# Altium PCB PCB1.PcbDoc (part 1 of 4)
Units mil, origin at the board's own origin, x right, y up, seen from the top; angles counter-clockwise.
Board outline 1280 x 1960 mil, 2 copper layers (Top Layer, Bottom Layer); 39 components, 61 nets, 283 pads, 76 vias.
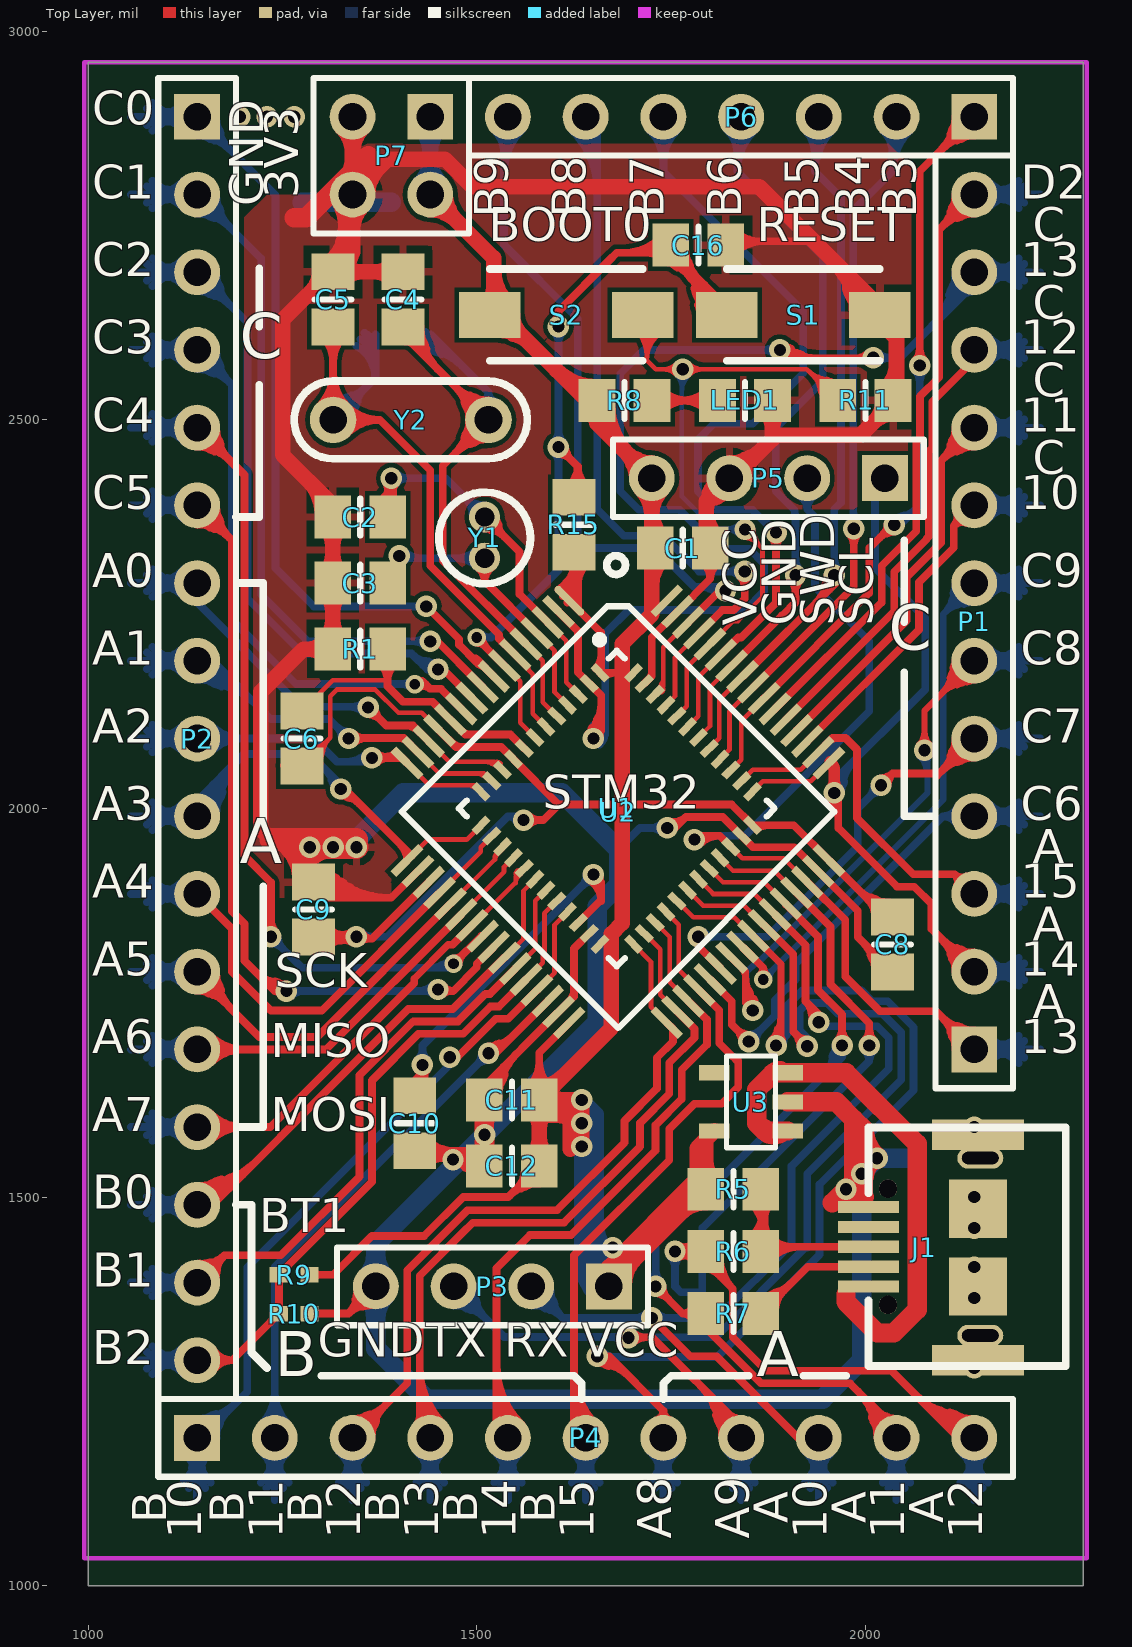
[diagram p0: Top Layer view]
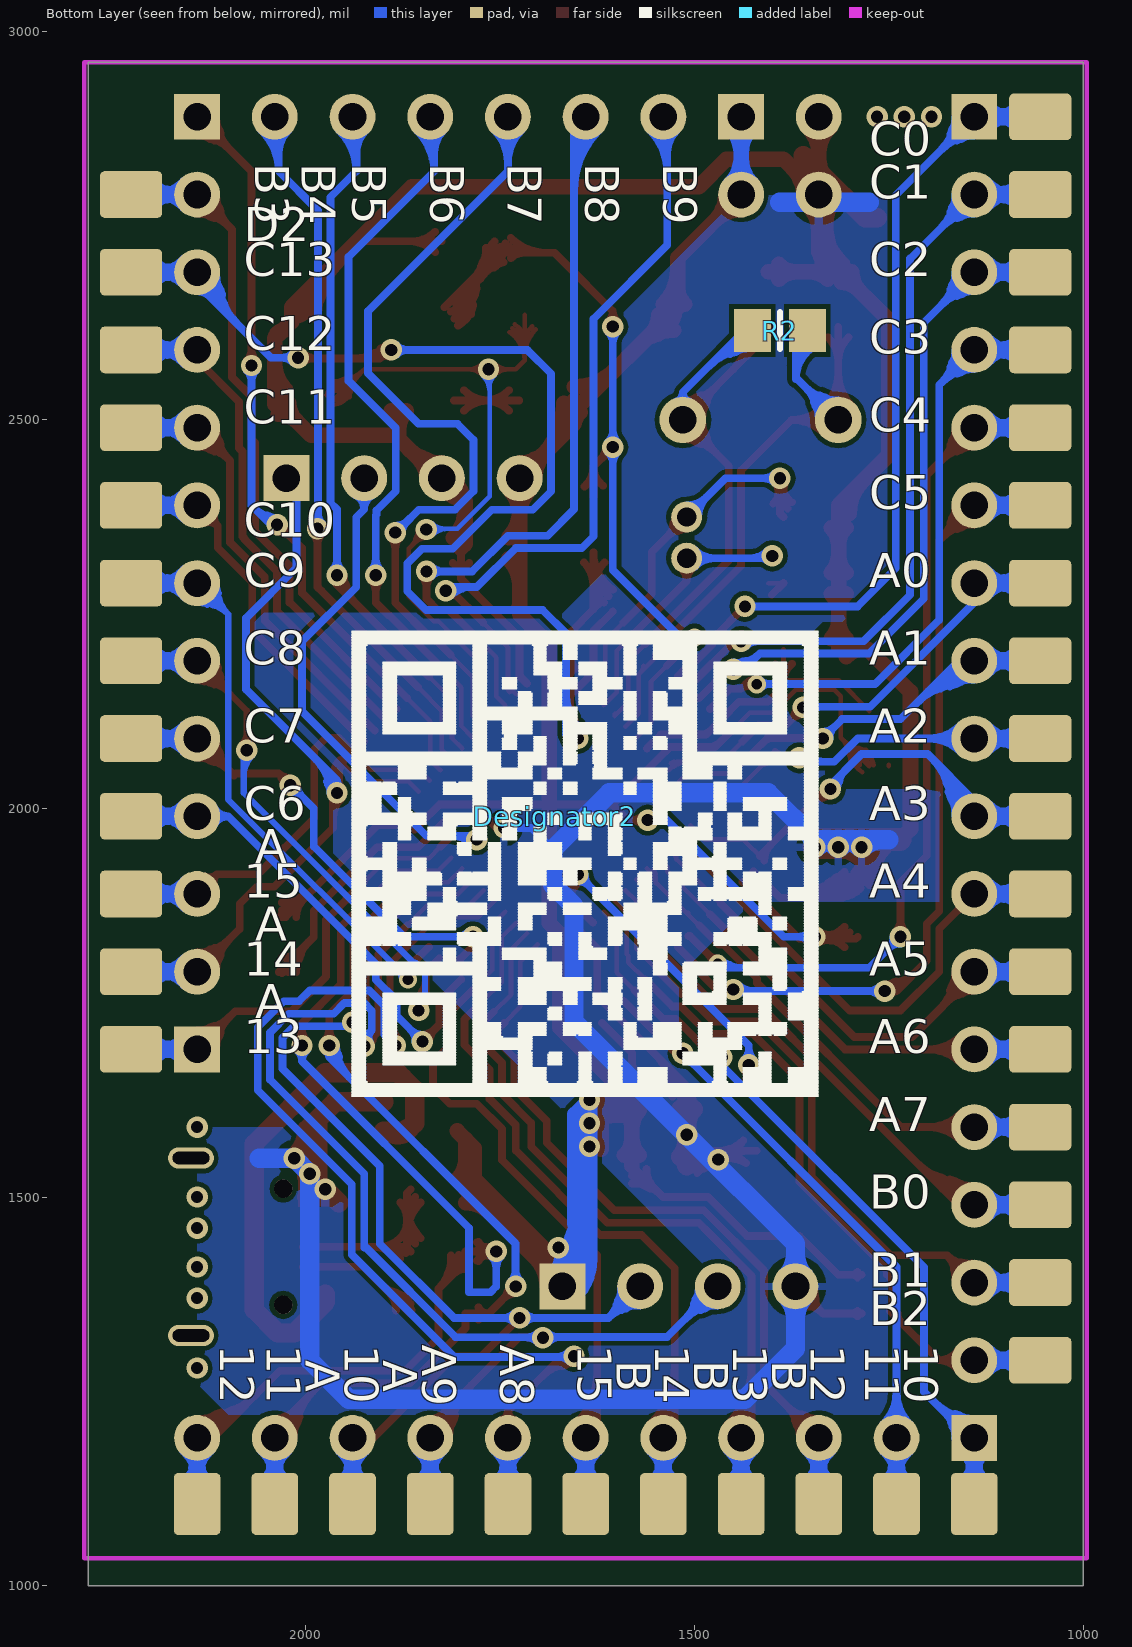
[diagram p1: Bottom Layer view, seen from below]

## Layer stack, top to bottom
Top Solder: solder mask 0.4, Solder Resist, Dk 3.5
Top Layer: signal copper 1.4
Dielectric 1: dielectric 12.6, FR-4, Dk 4.8
Bottom Layer: signal copper 1.4
Bottom Solder: solder mask 0.4, Solder Resist, Dk 3.5

## Board outline
1000,1000 2280,1000 2280,2960 1000,2960

## Design rules (kind name [scope] priority, off if disabled: settings)
Clearance [All] p1: gap=6
PolygonConnect [All] p1: connectstyle=Relief reliefconductorwidth=10 reliefentries=4 polygonreliefangle="90 Angle" airgapwidth=10
RoutingVias [All] p1: holewidth=15.75 width=27.56 viastyle="Through Hole" minholewidth=11.81 minwidth=23.62 maxholewidth=28 maxwidth=50
SolderMaskExpansion [All] p1: expansion=4
Width [All] p1: maxlimit=30 minlimit=6 preferedwidth=8
29 further rules are at their usual default settings.

## Components (designator, comment, footprint, x,y, rotation, side; value= is the part's Value field where it differs from the comment)
C1 "Cap" 6-0805_N 1765,2335 r0 top
C2 "Cap" 6-0805_N 1350,2375 r0 top
C3 "Cap" 6-0805_N 1350,2290 r0 top
C4 "Cap" 6-0805_N 1405,2655 r270 top
C5 "Cap" 6-0805_N 1315,2655 r270 top
C6 "Cap" 6-0805_N 1275,2090 r90 top
C8 "Cap" 6-0805_N 2035,1825 r270 top
C9 "Cap" 6-0805_N 1290,1870 r90 top
C10 "Cap" 6-0805_N 1420,1595 r90 top
C11 "Cap" 6-0805_N 1545,1625 r180 top
C12 "Cap" 6-0805_N 1545,1540 r180 top
C16 "Cap" 6-0805_N 1785,2725 r0 top
Designator2 "Comment" 二维码 1680,1990 r180 bottom
J1 "USB_M" usb-micro插 2120,1435 r270 top
LED1 "LED" 6-0805_N 1845,2525 r0 top
P1 "Header 12" HDR1X12 2140,1690 r90 top
P2 "Header 17" HDR1X17 1140,2890 r270 top
P3 "Header 4" HDR1X4 1670,1385 r180 top
P4 "Header 11" HDR1X11 1140,1190 r0 top
P5 "Header 4" HDR1X4 2025,2425 r180 top
P6 "Header 7" HDR1X7 2140,2890 r180 top
P7 "Header 2X2" HDR2X2 1440,2890 r180 top
R1 "0" 6-0805_N 1350,2205 r180 top
R2 "Res2" 6-0805_N 1390,2615 r180 bottom
R5 "Res2" 6-0805_N 1830,1510 r180 top
R6 "Res2" 6-0805_N 1830,1430 r0 top
R7 "Res2" 6-0805_N 1830,1350 r0 top
R8 "Res2" 6-0805_N 1690,2525 r0 top
R9 "Res2" 0402 1265,1400 r180 top
R10 "Res2" 0402 1265,1350 r180 top
R11 "Res2" 6-0805_N 2000,2525 r0 top
R15 "Res2" 6-0805_N 1625,2365 r90 top
S1 "SW-PB" key 1920,2635 r180 top
S2 "SW-PB" key 1615,2635 r180 top
U1 "stm32f401ccu6" qfn48精简 1680,2000 r315 top
U2 "STM32F103RCT6" lqfd64正常 1665,1995 r315 top
U3 "ldo3.3v" sot23_5 1850,1625 r270 top
Y1 "33.768K" XTAL_32.768 1510,2375 r270 top
Y2 "8M" 晶振2 1415,2500 r0 top

## Footprints (in the part's own frame and the unit in brackets; to place one, negate y for a bottom-side part, rotate by r counter-clockwise, add the part's x,y. Pads: shape width x height; smd on the part's side, far side on the other; paste and mask are expansions set on the pad)
6-0805_N [mm] "Chip Resistor, Body 2.0x1.2mm, IPC Medium Density"
  rect 1.2x1.4 smd: 1(-0.9,0) 2(0.9,0)
  silkscreen extent 0,-0.6 0,0.6, body extent -1.07,-0.7 1.07,0.7, height 0.7
0402 [mm] "Chip Capacitor, Body 1.0x0.5mm, IPC High Density"
  rect 0.6x0.5 smd: 1(-0.5,0) 2(0.5,0)
  body extent -0.55,-0.3 0.55,0.3, height 1.3
HDR1X4 [mm] "Connector; Header; 4 Position"
  rect 1.5x1.5 hole 0.9: 1(0,0)
  round 1.5 hole 0.9: 2(2.54,0) 3(5.08,0) 4(7.62,0)
  silkscreen extent -1.27,-1.27 8.89,1.27
HDR1X7 [mm] "Connector; Header; 7 Position"
  rect 1.5x1.5 hole 0.9: 1(0,0)
  round 1.5 hole 0.9: 2(2.54,0) 3(5.08,0) 4(7.62,0) 5(10.16,0) 6(12.7,0) 7(15.24,0)
  silkscreen extent -1.27,-1.27 16.51,1.27
HDR1X11 [mm] "Connector; Header; 11 Position"
  rect 1.5x1.5 hole 0.9: 1(0,0)
  round 1.5 hole 0.9: 2(2.54,0) 3(5.08,0) 4(7.62,0) 5(10.16,0) 6(12.7,0) 7(15.24,0) 8(17.78,0) 9(20.32,0) 10(22.86,0) 11(25.4,0)
  silkscreen extent -1.27,-1.27 26.67,1.27
HDR1X12 [mm] "Connector; Header; 12 Position"
  rect 1.5x1.5 hole 0.9: 1(0,0)
  round 1.5 hole 0.9: 2(2.54,0) 3(5.08,0) 4(7.62,0) 5(10.16,0) 6(12.7,0) 7(15.24,0) 8(17.78,0) 9(20.32,0) 10(22.86,0) 11(25.4,0) 12(27.94,0)
  silkscreen extent -1.27,-1.27 29.21,1.27
HDR1X17 [mm] "Connector; Header; 17 Position"
  rect 1.5x1.5 hole 0.9: 1(0,0)
  round 1.5 hole 0.9: 2(2.54,0) 3(5.08,0) 4(7.62,0) 5(10.16,0) 6(12.7,0) 7(15.24,0) 8(17.78,0) 9(20.32,0) 10(22.86,0) 11(25.4,0) 12(27.94,0) 13(30.48,0) 14(33.02,0) 15(35.56,0) 16(38.1,0) 17(40.64,0)
  silkscreen extent -1.27,-1.27 41.91,1.27
HDR2X2 [mm] "Connector; Header; 2x2 Position"
  rect 1.5x1.5 hole 0.9: 1(0,0)
  round 1.5 hole 0.9: 2(0,2.54) 3(2.54,0) 4(2.54,2.54)
  silkscreen extent -1.27,-1.27 3.81,3.81
key [mm]
  rect 2x1.5 smd: 1(-2.5,0) 2(2.5,0)
  silkscreen extent -2.5,-1.5 2.5,1.5
lqfd64正常 [mil]
  oval 50x10 smd: 1(-225,160)
  rect 50x10 smd: 2(-225,140.31) 3(-225,120.63) 4(-225,100.94) 5(-225,81.26) 6(-225,61.57) 7(-225,41.89) 8(-225,22.2) 9(-225,2.52) 10(-225,-17.17) 11(-225,-36.85) 12(-225,-56.54) 13(-225,-76.22) 14(-225,-95.91) 15(-225,-115.59) 16(-225,-135.28) 33(247.44,-135.28) 34(247.44,-115.59) 35(247.44,-95.91) 36(247.44,-76.22) 37(247.44,-56.54) 38(247.44,-36.85) 39(247.44,-17.17) 40(247.44,2.52) 41(247.44,22.2) 42(247.44,41.89) 43(247.44,61.57) 44(247.44,81.26) 45(247.44,100.94) 46(247.44,120.63) 47(247.44,140.31) 48(247.44,160)
  rect 10x50 smd: 17(-136.42,-223.86) 18(-116.73,-223.86) 19(-97.05,-223.86) 20(-77.36,-223.86) 21(-57.68,-223.86) 22(-37.99,-223.86) 23(-18.31,-223.86) 24(1.38,-223.86) 25(21.06,-223.86) 26(40.75,-223.86) 27(60.43,-223.86) 28(80.12,-223.86) 29(99.8,-223.86) 30(119.49,-223.86) 31(139.17,-223.86) 32(158.86,-223.86) 49(158.86,248.58) 50(139.17,248.58) 51(119.49,248.58) 52(99.8,248.58) 53(80.12,248.58) 54(60.43,248.58) 55(40.75,248.58) 56(21.06,248.58) 57(1.38,248.58) 58(-18.31,248.58) 59(-37.99,248.58) 60(-57.68,248.58) 61(-77.36,248.58) 62(-97.05,248.58) 63(-116.73,248.58) 64(-136.42,248.58)
  silkscreen extent -227,-184 208,247
qfn48精简 [mm]
  rect 0.65x0.25 smd: 1(-3.525,2.75) 2(-3.525,2.25) 3(-3.525,1.75) 4(-3.525,1.25) 5(-3.525,0.75) 6(-3.525,0.25) 7(-3.525,-0.25) 8(-3.525,-0.75) 9(-3.525,-1.25) 10(-3.525,-1.75) 11(-3.525,-2.25) 12(-3.525,-2.75) 25(3.525,-2.75) 26(3.525,-2.25) 27(3.525,-1.75) 28(3.525,-1.25) 29(3.525,-0.75) 30(3.525,-0.25) 31(3.525,0.25) 32(3.525,0.75) 33(3.525,1.25) 34(3.525,1.75) 35(3.525,2.25) 36(3.525,2.75)
  rect 0.25x0.65 smd: 13(-2.75,-3.525) 14(-2.25,-3.525) 15(-1.75,-3.525) 16(-1.25,-3.525) 17(-0.75,-3.525) 18(-0.25,-3.525) 19(0.25,-3.525) 20(0.75,-3.525) 21(1.25,-3.525) 22(1.75,-3.525) 23(2.25,-3.525) 24(2.75,-3.525) 37(2.75,3.525) 38(2.25,3.525) 39(1.75,3.525) 40(1.25,3.525) 41(0.75,3.525) 42(0.25,3.525) 43(-0.25,3.525) 44(-0.75,3.525) 45(-1.25,3.525) 46(-1.75,3.525) 47(-2.25,3.525) 48(-2.75,3.525)
  silkscreen extent -4.42,-3.65 3.65,3.65
sot23_5 [mm]
  rect 0.5x1 smd: 1(1.016,1.27) 2(0.066,1.27) 3(-0.884,1.27) 4(-0.884,-1.13) 5(1.016,-1.13)
  silkscreen extent -1.43,-0.73 1.57,0.87, body extent -1.38,-1.33 1.52,1.47, height 1.09
usb-micro插 [mm]
  rect 1x3 smd: 0(-3.683,0.635) 0(3.683,0.635)
  oval 0.7x1.5 hole 0.4 slot 1.2 at 90 deg: 0(-2.925,0.707) 0(2.875,0.707)
  round 0.6 hole 0.6: 0(-1.925,-2.311) 0(1.875,-2.311)
  rect 1.9x1.9 smd: 0(-1.27,0.635) 0(1.27,0.635)
  rect 0.4x2 smd: 1(1.275,-2.943) 2(0.625,-2.943) 3(-0.025,-2.943) 4(-1.325,-2.943) 5(-0.675,-2.943)
  silkscreen extent -3.92,-2.95 3.87,3.5, body extent -3.92,-3.55 3.87,3.5, height 2.78
XTAL_32.768 [mil] "32.768k柱式晶振（未加焊）"
  round 40 hole 25: 1(0,0) 2(53,0)
  silkscreen extent -32,-59 86,59, body extent -33,-59 85,59, height 354
二维码 [mil]
  silkscreen extent -261,-360 339,238
晶振2 [mil]
  round 60 hole 35.43: 1(100,0) 2(-100,0)
  silkscreen extent -150,-50 150,50

## Part data
C1 C2 C3 C4 C5 C6 C8 C9 C10 C11 C12 C16: "Capacitor"
LED1: library part 发光二极管
P1: "Header, 12-Pin"
P2: "Header, 17-Pin"
P3 P5: "Header, 4-Pin"
P4: "Header, 11-Pin"
P6: "Header, 7-Pin"
P7: "Header, 2-Pin, Dual row"
R1: library part Res2, "Resistor"
R2 R5 R6 R7 R8 R9 R10 R11 R15: "Resistor"
S1 S2: "Switch"
U1 U3: library part Component_1
U2: library part STM32F103RDT6, "ST High-density performance line ARM-based 32-bit MCU with 256 to  512KB Flash, USB, CAN, 11 timers, 3 ADCs, 13 communication interfaces"
Y1 Y2: library part 晶振

## Free pads (board coordinates)
  rrect20% 80x60 smd far side: 1(1055,1290) 1(1055,1390) 1(1055,1490) 1(1055,1590) 1(1055,1690) 1(1055,1790) 1(1055,1890) 1(1055,1990) 1(1055,2090) 1(1055,2190) 1(1055,2290) 1(1055,2390) 1(1055,2490) 1(1055,2590) 1(1055,2690) 1(1055,2790) 1(1055,2890) 1(2225,1690) 1(2225,1790) 1(2225,1890) 1(2225,1990) 1(2225,2090) 1(2225,2190) 1(2225,2290) 1(2225,2390) 1(2225,2490) 1(2225,2590) 1(2225,2690) 1(2225,2790)
  rrect20% 60x80 smd far side: 1(1140,1105) 1(1240,1105) 1(1340,1105) 1(1440,1105) 1(1540,1105) 1(1640,1105) 1(1740,1105) 1(1840,1105) 1(1940,1105) 1(2040,1105) 1(2140,1105)

## Via types
v1: diameter 27.56, hole 15.75, Top Layer to Bottom Layer, tented both sides, 72 vias
v2: diameter 23.62, hole 13.78, Top Layer to Bottom Layer, tented both sides, 4 vias

## Nets (pads, with @x,y where several pads share a name; then routed paths per layer and width w, separated by ;. In a path a pad name is that pad's centre, name@x,y a point inside that pad or via, vN(x,y) a via of type N, cw(c..) or ccw(c..) an arc to the next point about the centre after c; other vN are vias at no path point)
BOOT0: R11.1 S2.1 U1.44 U2.60 | length 2206.8
  Top Layer w6: S2.1@1718.43,2635 1718.43,2576.57 1730,2565 v1(1765,2565) 1924.57,2565 ; U1.44@1757.25,2119.01 1770,2131.76 1770,2181.57 U2.60@1799.99,2211.56 1829.65,2241.22 1836.06,2241.22 1867.56,2272.72 1867.56,2334.44 1845,2356.99 v1@1845,2360 ; v1@1843.79,2358.84 ccw(c1859.81,2360.98) 1855.62,2345.37 ; v1@1845.32,2360.18 cw(c1840.18,2341.18) 1859.19,2346.28 ; 1934.57,2555 1924.57,2565 ; 1938.92,2547.7 ccw(c1968.07,2555.51) R11.1@1964.13,2525.59 ; 1939.74,2555.09 cw(c1931,2517.12) R11.1@1967.75,2530.06 ; R11.1@1941.24,2539.02 ccw(c1966.8,2545.87) R11.1@1963.34,2519.64 ; 1950.37,2552.65 cw(c1943.18,2521.41) R11.1@1973.41,2532.05 ; R11.1@1964.57,2525 1924.57,2565 ; 1738.98,2565 cw(c1738.98,2538.98) 1757.38,2557.38 ccw(c1738.98,2538.98) 1738.98,2565 ; 1738.98,2565 ccw(c1738.98,2591.02) 1757.38,2572.62 cw(c1738.98,2591.02) 1738.98,2565 ; 1791.02,2565 cw(c1791.02,2591.02) 1772.62,2572.62 ccw(c1791.02,2591.02) 1791.02,2565 ; 1791.02,2565 ccw(c1791.02,2538.98) 1772.62,2557.38 cw(c1791.02,2538.98) 1791.02,2565 ; 1924.57,2565 ccw(c1961.96,2602.38) 1963.84,2549.55 cw(c1961.96,2602.38) 1924.57,2565 ; S2.1@1704.51,2616.24 cw(c1670.92,2582.65) 1718.43,2582.65 ccw(c1670.92,2582.65) S2.1@1704.51,2616.24 ; S2.1@1708.75,2620.48 cw(c1685.4,2597.13) 1718.43,2597.13 ccw(c1685.4,2597.13) S2.1@1708.75,2620.48 ; 1718.43,2576.38 cw(c1762.36,2576.38) 1737.98,2612.93 ccw(c1762.36,2576.38) 1718.43,2576.38 ; 1718.43,2587.59 cw(c1754.88,2587.59) 1734.66,2617.92 ccw(c1754.88,2587.59) 1718.43,2587.59 ; 1718.43,2598.8 cw(c1747.41,2598.8) 1731.33,2622.91 ccw(c1747.41,2598.8) 1718.43,2598.8 ; v1@1845,2348.22 cw(c1845,2327.04) 1859.98,2342.02 ccw(c1845,2327.04) v1@1845,2348.22 ; v1@1849.78,2359 ccw(c1866.16,2359) 1854.58,2347.42 cw(c1866.16,2359) v1@1849.78,2359 ; v1@1855.78,2359 ccw(c1886.64,2359) 1864.82,2337.18 cw(c1886.64,2359) v1@1855.78,2359 ; 1932.15,2557.42 cw(c1903.66,2528.94) 1943.95,2528.94 ccw(c1903.66,2528.94) 1932.15,2557.42 ; 1934.32,2555.25 ccw(c1962.63,2583.56) 1964.05,2543.55 cw(c1962.63,2583.56) 1934.32,2555.25 ; R11.1@1942.39,2547.18 cw(c1924.15,2528.94) 1949.95,2528.94 ccw(c1924.15,2528.94) R11.1@1942.39,2547.18 ; R11.1@1944.07,2545.5 ccw(c1963.3,2564.73) 1964.26,2537.55 cw(c1963.3,2564.73) R11.1@1944.07,2545.5
  Bottom Layer w6: v1(1765,2565) 1763.53,2563.53 1763.53,2401.47 1805,2360 v1@1845,2360 ; v1@1757.38,2557.38 cw(c1742.53,2542.53) 1763.53,2542.53 ccw(c1742.53,2542.53) v1@1757.38,2557.38 ; 1763.53,2535.42 cw(c1794.58,2535.42) 1772.62,2557.38 ccw(c1794.58,2535.42) 1763.53,2535.42 ; 1763.53,2549.91 cw(c1780.09,2549.91) 1768.38,2561.62 ccw(c1780.09,2549.91) 1763.53,2549.91 ; 1816.56,2360 cw(c1816.56,2330.56) 1837.38,2351.38 ccw(c1816.56,2330.56) 1816.56,2360 ; 1821.39,2360 ccw(c1821.39,2382.61) 1837.38,2366.62 cw(c1821.39,2382.61) 1821.39,2360 ; 1831.05,2360 cw(c1831.05,2345.05) 1841.62,2355.62 ccw(c1831.05,2345.05) 1831.05,2360
  other v1: 1845,2359
BOOT1: P2.17 pad.1@1055,1290 R9.2 R10.2 U1.20 U2.28 | length 2107.5
  Top Layer w6: U2.28@1563.36,1780.06 1585,1801.7 1585,1810.57 1587,1812.57 1587,1865.24 U1.20@1602.75,1880.99
  Top Layer w10: P2.17@1140,1290 1185.31,1290 ; U2.28@1563.36,1780.06 1528.63,1745.32 1517.65,1745.32 1482.33,1710 1425,1710 1365,1650 1365,1519.69 R9.2@1245.31,1400 R10.2@1245.31,1350 1185.31,1290 ; 1185.31,1290 cw(c1185.31,1319.59) 1160.54,1303.41 ccw(c1185.31,1319.59) 1185.31,1290 ; 1185.31,1290 ccw(c1185.31,1260.41) 1160.54,1276.59 cw(c1185.31,1260.41) 1185.31,1290 ; 1245.31,1361.69 cw(c1233.62,1361.69) 1241.89,1353.42 ccw(c1233.62,1361.69) 1245.31,1361.69 ; 1245.31,1361.69 ccw(c1257,1361.69) 1248.74,1353.42 cw(c1257,1361.69) 1245.31,1361.69 ; 1245.31,1388.31 cw(c1257,1388.31) 1248.74,1396.58 ccw(c1257,1388.31) 1245.31,1388.31 ; 1245.31,1388.31 ccw(c1233.62,1388.31) 1241.89,1396.58 cw(c1233.62,1388.31) 1245.31,1388.31 ; 1233.69,1338.37 ccw(c1222.06,1350) 1238.5,1350 cw(c1222.06,1350) 1233.69,1338.37 ; R9.2@1252.12,1400 cw(c1268.57,1400) 1256.94,1411.63 ccw(c1268.57,1400) R9.2@1252.12,1400
  Bottom Layer w10: pad.1@1055,1290 P2.17@1140,1290 ; P2.17@1116.78,1282.1 ccw(c1095.78,1274.96) 1101.52,1296.39 ccw(c1105.72,1312.07) P2.17@1119.38,1303.28 ; P2.17@1116.78,1297.9 cw(c1095.78,1305.04) 1101.52,1283.61 cw(c1105.72,1267.93) P2.17@1119.38,1276.72 ; pad.1@1080.79,1290 cw(c1080.79,1230.79) 1122.66,1272.66 ccw(c1080.79,1230.79) pad.1@1080.79,1290 ; pad.1@1080.79,1290 ccw(c1080.79,1349.21) 1122.66,1307.34 cw(c1080.79,1349.21) pad.1@1080.79,1290 ; pad.1@1086.36,1277.01 cw(c1099.56,1268.97) 1103.56,1283.9 ; pad.1@1086.36,1277.01 cw(c1099.56,1268.97) 1103.56,1283.9 ; pad.1@1086.36,1277.01 cw(c1099.56,1268.97) 1103.56,1283.9 ; pad.1@1086.36,1302.99 ccw(c1099.56,1311.03) 1103.56,1296.1 ; pad.1@1086.36,1302.99 ccw(c1099.56,1311.03) 1103.56,1296.1 ; pad.1@1086.36,1302.99 ccw(c1099.56,1311.03) 1103.56,1296.1 ; pad.1@1088.73,1282.12 cw(c1109.12,1275.35) 1103.56,1296.1 ; pad.1@1088.73,1282.12 cw(c1109.12,1275.35) 1103.56,1296.1 ; pad.1@1088.73,1282.12 cw(c1109.12,1275.35) 1103.56,1296.1 ; pad.1@1088.73,1297.88 ccw(c1109.12,1304.65) 1103.56,1283.9 ; pad.1@1088.73,1297.88 ccw(c1109.12,1304.65) 1103.56,1283.9 ; pad.1@1088.73,1297.88 ccw(c1109.12,1304.65) 1103.56,1283.9 ; 1101.21,1290 cw(c1101.21,1326.21) 1075.61,1300.61 ccw(c1101.21,1326.21) 1101.21,1290 ; 1101.21,1290 ccw(c1101.21,1253.79) 1075.61,1279.39 cw(c1101.21,1253.79) 1101.21,1290 ; 1104.93,1290 cw(c1104.93,1254.93) 1129.73,1279.73 ccw(c1104.93,1254.93) 1104.93,1290 ; 1104.93,1290 ccw(c1104.93,1325.07) 1129.73,1300.27 cw(c1104.93,1325.07) 1104.93,1290 ; P2.17@1125.36,1290 cw(c1125.36,1350.36) 1082.68,1307.68 ccw(c1125.36,1350.36) P2.17@1125.36,1290 ; P2.17@1125.36,1290 ccw(c1125.36,1229.64) 1082.68,1272.32 cw(c1125.36,1229.64) P2.17@1125.36,1290
FCS: P2.11 pad.1@1055,1890 U1.14 U2.20 | length 1594.3
  Top Layer w6: U2.20@1452,1891.41 1505,1944.41 1505,1950 1519.23,1964.23 U1.14@1519.23,1964.51 ; 1510.19,1955.19 ccw(c1506.44,1958.94) 1511.74,1958.94 cw(c1506.44,1958.94) 1510.19,1955.19
  Top Layer w10: P2.11@1140,1890 1185,1845 1185,1790 1235,1740 1300,1740 1300.3,1739.7 U2.20@1452,1891.41
  Bottom Layer w10: pad.1@1055,1890 P2.11@1140,1890 ; P2.11@1116.78,1882.1 ccw(c1095.78,1874.96) 1101.52,1896.39 ccw(c1105.72,1912.07) P2.11@1119.38,1903.28 ; P2.11@1116.78,1897.9 cw(c1095.78,1905.04) 1101.52,1883.61 cw(c1105.72,1867.93) P2.11@1119.38,1876.72 ; pad.1@1080.79,1890 cw(c1080.79,1830.79) 1122.66,1872.66 ccw(c1080.79,1830.79) pad.1@1080.79,1890 ; pad.1@1080.79,1890 ccw(c1080.79,1949.21) 1122.66,1907.34 cw(c1080.79,1949.21) pad.1@1080.79,1890 ; pad.1@1086.36,1877.01 cw(c1099.56,1868.97) 1103.56,1883.9 ; pad.1@1086.36,1877.01 cw(c1099.56,1868.97) 1103.56,1883.9 ; pad.1@1086.36,1877.01 cw(c1099.56,1868.97) 1103.56,1883.9 ; pad.1@1086.36,1902.99 ccw(c1099.56,1911.03) 1103.56,1896.1 ; pad.1@1086.36,1902.99 ccw(c1099.56,1911.03) 1103.56,1896.1 ; pad.1@1086.36,1902.99 ccw(c1099.56,1911.03) 1103.56,1896.1 ; pad.1@1088.73,1882.12 cw(c1109.12,1875.35) 1103.56,1896.1 ; pad.1@1088.73,1882.12 cw(c1109.12,1875.35) 1103.56,1896.1 ; pad.1@1088.73,1882.12 cw(c1109.12,1875.35) 1103.56,1896.1 ; pad.1@1088.73,1897.88 ccw(c1109.12,1904.65) 1103.56,1883.9 ; pad.1@1088.73,1897.88 ccw(c1109.12,1904.65) 1103.56,1883.9 ; pad.1@1088.73,1897.88 ccw(c1109.12,1904.65) 1103.56,1883.9 ; 1101.21,1890 cw(c1101.21,1926.21) 1075.61,1900.61 ccw(c1101.21,1926.21) 1101.21,1890 ; 1101.21,1890 ccw(c1101.21,1853.79) 1075.61,1879.39 cw(c1101.21,1853.79) 1101.21,1890 ; 1104.93,1890 cw(c1104.93,1854.93) 1129.73,1879.73 ccw(c1104.93,1854.93) 1104.93,1890 ; 1104.93,1890 ccw(c1104.93,1925.07) 1129.73,1900.27 cw(c1104.93,1925.07) 1104.93,1890 ; P2.11@1125.36,1890 cw(c1125.36,1950.36) 1082.68,1907.68 ccw(c1125.36,1950.36) P2.11@1125.36,1890 ; P2.11@1125.36,1890 ccw(c1125.36,1829.64) 1082.68,1872.32 cw(c1125.36,1829.64) P2.11@1125.36,1890
GND: C1.2 C2.1 C3.1 C4.1 C5.1 C8.2 C9.2 C10.1 C11.2 C12.2 C16.2 J1.4 LED1.2 P3.4 P5.3 P7.3 P7.4 R1.2 R10.1 R11.2 S1.1 U1.23 U1.35 U1.47 U2.18 U2.31 U2.47 U2.63 U3.2 | length 14476
  Top Layer w10: R10.1@1284.69,1350 1335,1350 ; C9.2@1290,1905.43 1310.43,1885 1389.92,1885 U2.18@1424.17,1919.25 ; C9.2@1292.86,1906.3 cw(c1308.32,1893.9) 1319.38,1910.33 ; C9.2@1298.58,1898.17 cw(c1310.85,1879) 1322.24,1898.71 ; C9.2@1300.66,1900.04 cw(c1316.83,1887.08) 1328.4,1904.26 ; C9.2@1301.17,1888.27 cw(c1310.89,1865.19) 1323.41,1886.88 cw(c1334.26,1905.68) C9.2@1312.56,1905.55 ; C9.2@1303.97,1889.75 cw(c1320.84,1863.4) 1336.47,1890.49 ; C9.2@1308.46,1893.78 cw(c1325.34,1880.25) 1337.42,1898.19 ; C9.2@1311.92,1910.25 ccw(c1327.88,1914.53) 1319.62,1900.22 ; 1343.99,1368.32 cw(c1387.17,1362.8) P3.4@1360.53,1397.24 ; 1353.32,1358.99 ccw(c1347.8,1402.17) P3.4@1382.24,1375.53 ; P3.4@1370,1385 1335,1350 ; C10.1@1420,1559.57 1490.87,1559.57 C12.2@1510,1540.43 ; v1@1466.69,1549.42 ccw(c1477.69,1566.95) C12.2@1494.47,1554.84 ; v1@1474.38,1554.64 ccw(c1483.71,1570.8) C12.2@1496.65,1557.35 ; v1@1475.72,1543.75 ccw(c1486.36,1560.69) C12.2@1502.57,1548.98 ; 1483.88,1549.15 cw(c1475.62,1534.84) C12.2@1491.58,1539.12 ; 1484.76,1538.08 ccw(c1495.02,1554.43) C12.2@1510.68,1543.13 ; 1485.89,1547.99 ccw(c1493.3,1560.83) C12.2@1503.59,1550.15 ; C11.2@1507.65,1637.34 ccw(c1502.52,1659.92) 1524.89,1653.93 ; C11.2@1509.57,1625 1509.57,1642.75 U2.31@1605.12,1738.3 1625,1758.18 1625,1819.72 U1.23@1644.51,1839.23 ; C11.2@1510.12,1627.68 ccw(c1491.54,1669.7) 1535.92,1657.81 ; C11.2@1524.04,1650.79 ccw(c1540,1646.51) C11.2@1525.69,1638.25 ; U1.47@1715.49,2160.77 1725.1,2170.38 1725.1,2220.19 U2.63@1758.23,2253.32 1758.32,2253.32 1800.43,2295.43 ; v1@1744.15,1975.88 cw(c1762.2,1957.15) 1762.68,1983.15 ; v1(1745,1975) 1755,1975 1769,1989 ; C1.2@1800.43,2335 1800.43,2295.43 ; C16.2@1825.43,2730 1933.43,2730 ; 2006.15,1813.03 ccw(c2040.15,1822.14) C8.2@2030.69,1788.24 ; C8.2@2035,1789.57 1990,1834.57 1990,1868.43 U2.47@1939.18,1919.25 1908.43,1950 1855.28,1950 U1.35@1840.77,1964.51 1816.28,1989 1769,1989 ; 1298.35,1350 cw(c1298.35,1361.69) 1290.08,1353.42 ccw(c1298.35,1361.69) 1298.35,1350 ; 1298.35,1350 ccw(c1298.35,1338.31) 1290.08,1346.58 cw(c1298.35,1338.31) 1298.35,1350 ; 1335,1350 cw(c1361.64,1323.36) 1366.7,1360.69 ccw(c1361.64,1323.36) 1335,1350 ; 1335,1350 ccw(c1308.36,1376.64) 1345.69,1381.7 cw(c1308.36,1376.64) 1335,1350 ; v1@1468.89,1559.57 cw(c1468.89,1604.53) 1437.1,1572.74 ccw(c1468.89,1604.53) v1@1468.89,1559.57 ; v1@1468.89,1559.57 ccw(c1468.89,1514.61) 1437.1,1546.4 cw(c1468.89,1514.61) v1@1468.89,1559.57 ; 1769,1989 cw(c1753.5,2004.5) 1747.43,1983.44 ccw(c1753.5,2004.5) 1769,1989 ; 1800.43,2295.44 cw(c1825.2,2295.44) 1811.06,2315.77 ccw(c1825.2,2295.44) 1800.43,2295.44 ; 1800.43,2295.44 ccw(c1775.66,2295.44) 1789.8,2315.77 cw(c1775.66,2295.44) 1800.43,2295.44 ; C9.2@1285.89,1897.39 ccw(c1315.8,1927.3) 1315.8,1885 cw(c1315.8,1927.3) C9.2@1285.89,1897.39 ; C9.2@1292.96,1904.46 ccw(c1339.94,1951.44) 1339.94,1885 cw(c1339.94,1951.44) C9.2@1292.96,1904.46 ; C9.2@1300.03,1911.53 ccw(c1364.08,1975.58) 1364.08,1885 cw(c1364.08,1975.58) C9.2@1300.03,1911.53 ; C9.2@1307.1,1918.6 ccw(c1388.23,1999.72) 1388.23,1885 cw(c1388.23,1999.72) C9.2@1307.1,1918.6 ; C10.1@1426.87,1559.57 cw(c1426.87,1461.24) 1496.4,1530.77 ccw(c1426.87,1461.24) C10.1@1426.87,1559.57 ; C10.1@1433.26,1543.45 cw(c1457.05,1502.28) v1(1469.33,1548.21) ccw(c1457.05,1502.28) C10.1@1433.26,1543.45 ; C10.1@1440.06,1568.89 ccw(c1476.74,1590.09) 1465.8,1549.16 cw(c1476.74,1590.09) C10.1@1440.06,1568.89 ; 1451.01,1559.57 cw(c1451.01,1485.39) 1503.47,1537.84 ccw(c1451.01,1485.39) 1451.01,1559.57 ; v1@1475.16,1559.57 cw(c1475.16,1509.53) 1510.54,1544.91 ccw(c1475.16,1509.53) v1@1475.16,1559.57 ; C11.2@1518.19,1628.94 cw(c1572.34,1628.94) 1534.05,1667.23 ccw(c1572.34,1628.94) C11.2@1518.19,1628.94 ; C11.2@1528.19,1628.94 cw(c1606.49,1628.94) 1551.12,1684.3 ccw(c1606.49,1628.94) C11.2@1528.19,1628.94 ; U2.31@1619.26,1752.44 ccw(c1605.4,1766.3) 1625,1766.3 cw(c1605.4,1766.3) U2.31@1619.26,1752.44 ; U1.47@1721.12,2166.28 ccw(c1711.49,2175.91) 1725.1,2175.91 cw(c1711.49,2175.91) U1.47@1721.12,2166.28 ; C16.2@1833.6,2715.77 cw(c1867.96,2681.41) 1867.96,2730 ccw(c1867.96,2681.41) C16.2@1833.6,2715.77 ; C16.2@1833.6,2742.1 ccw(c1862.82,2771.33) 1862.82,2730 cw(c1862.82,2771.33) C16.2@1833.6,2742.1 ; 1996.49,1828.08 cw(c1957.98,1789.57) 2012.44,1789.57 ccw(c1957.98,1789.57) 1996.49,1828.08 ; 2005.99,1818.57 ccw(c2031.06,1843.64) 2031.06,1808.19 cw(c2031.06,1843.64) 2005.99,1818.57 ; C8.2@2013.56,1811.01 cw(c1992.12,1789.57) 2022.44,1789.57 ccw(c1992.12,1789.57) C8.2@2013.56,1811.01
  Top Layer w20: 1235.43,1960 1222,1973.43 1222,2150 1277,2205 R1.2@1314.57,2205 C3.1@1314.57,2290 C2.1@1314.57,2375 1314.57,2390.43 1250,2455 1250,2628.37 1312.06,2690.43 C5.1@1315,2690.43 ; v1@1287.98,1947.68 ccw(c1307.48,1932.48) C9.2@1290,1915 ; C9.2@1290,1905.43 C9.2@1290,1915 ; C5.1@1331.16,2696.44 cw(c1373.14,2717.08) 1332.63,2740.47 ; P7.4@1339.54,2790.09 cw(c1372.6,2783.32) 1363.86,2815.92 ; P7.3@1340,2890 1340,2820 P7.4@1340,2790 ; P7.4@1340.09,2789.54 ccw(c1333.32,2822.6) 1365.92,2813.86 ; C4.1@1405,2690.43 C5.1@1315,2690.43 ; 1798.92,2405.08 cw(c1828.14,2394.58) P5.3@1824.95,2425.47 ; C1.2@1800.43,2335 1795,2340.43 1795,2395 ; 1805.08,2398.92 ccw(c1794.58,2428.14) P5.3@1825.47,2424.95 ; P5.3@1805.52,2423.61 cw(c1768.54,2420.97) 1795,2395 ; P5.3@1805.56,2423.14 cw(c1771.51,2419.88) 1795.47,2395.46 ; P5.3@1823.14,2405.56 ccw(c1819.88,2371.51) 1795.46,2395.47 ; P5.3@1823.61,2405.52 ccw(c1820.97,2368.54) 1795,2395 ; P5.3@1824.55,2425.13 cw(c1861.81,2414.19) 1851.75,2451.7 ; P5.3@1825.05,2424.53 ccw(c1821.99,2453.52) 1850.15,2445.97 ; 1880.22,2475.22 1825,2420 P5.3@1825,2425 1795,2395 ; 1880.43,2475 LED1.2@1880.43,2510 ; 1885.43,2480 1993.38,2480 2035.43,2522.06 R11.2@2035.43,2525 ; 1979.59,2670.34 ccw(c2034.46,2685.04) S1.1@2008.37,2634.58 ; S1.1@2035.43,2609.57 2018.43,2626.57 2018.43,2645 1933.43,2730 1863.43,2800 1494.39,2800 1458.86,2835.53 1385.53,2835.53 P7.4@1340,2790 ; R11.2@2040,2520.43 2040,2605 ; 1255,1950 cw(c1212.81,1907.8) 1272.45,1905.87 ccw(c1212.81,1907.8) 1255,1950 ; 1255,1950 C9.2@1290,1915 ; 1281.68,2205 cw(c1281.68,2172.11) 1304.93,2195.37 ccw(c1281.68,2172.11) 1281.68,2205 ; 1281.68,2205 ccw(c1281.68,2237.89) 1304.93,2214.63 cw(c1281.68,2237.89) 1281.68,2205 ; 1314.57,2253.18 cw(c1347.45,2253.18) 1324.2,2276.43 ccw(c1347.45,2253.18) 1314.57,2253.18 ; 1314.57,2253.18 ccw(c1281.68,2253.18) 1304.94,2276.43 cw(c1281.68,2253.18) 1314.57,2253.18 ; 1314.57,2326.82 cw(c1281.68,2326.82) 1304.94,2303.57 ccw(c1281.68,2326.82) 1314.57,2326.82 ; 1314.57,2326.82 ccw(c1347.45,2326.82) 1324.2,2303.57 cw(c1347.45,2326.82) 1314.57,2326.82 ; 1314.57,2338.18 cw(c1347.45,2338.18) 1324.2,2361.43 ccw(c1347.45,2338.18) 1314.57,2338.18 ; 1314.57,2338.18 ccw(c1281.68,2338.18) 1304.94,2361.43 cw(c1281.68,2338.18) 1314.57,2338.18 ; C5.1@1315,2690.43 1340,2715.43 ; P7.4@1323.09,2780.24 cw(c1270.15,2749.67) 1329.2,2733.85 ; P7.4@1323.09,2780.24 cw(c1270.15,2749.67) 1329.2,2733.85 ; P7.4@1323.09,2780.24 cw(c1270.15,2749.67) 1329.2,2733.85 ; 1334.32,2752.96 cw(c1366.34,2744.37) P7.4@1349.76,2773.09 ; 1334.32,2752.96 cw(c1366.34,2744.37) P7.4@1349.76,2773.09 ; 1334.32,2752.96 cw(c1366.34,2744.37) P7.4@1349.76,2773.09 ; 1340,2715.43 ccw(c1359.03,2696.4) 1332.41,2692.44 cw(c1359.03,2696.4) 1340,2715.43 ; 1340,2715.43 P7.4@1340,2790 ; 1340,2742.86 cw(c1387.14,2742.86) 1353.81,2776.19 ccw(c1387.14,2742.86) 1340,2742.86 ; 1340,2742.86 ccw(c1292.86,2742.86) 1326.19,2776.19 cw(c1292.86,2742.86) 1340,2742.86 ; 1340,2837.14 cw(c1292.86,2837.14) 1326.19,2803.81 ccw(c1292.86,2837.14) 1340,2837.14 ; 1340,2837.14 ccw(c1387.14,2837.14) 1353.81,2803.81 cw(c1387.14,2837.14) 1340,2837.14 ; 1340,2842.86 cw(c1387.14,2842.86) 1353.81,2876.19 ccw(c1387.14,2842.86) 1340,2842.86 ; 1340,2842.86 ccw(c1292.86,2842.86) 1326.19,2876.19 cw(c1292.86,2842.86) 1340,2842.86 ; 1351.82,2690.43 cw(c1351.82,2723.32) 1328.57,2700.07 ccw(c1351.82,2723.32) 1351.82,2690.43 ; 1351.82,2690.43 ccw(c1351.82,2657.55) 1328.57,2680.8 cw(c1351.82,2657.55) 1351.82,2690.43 ; 1368.18,2690.43 cw(c1368.18,2657.55) 1391.43,2680.8 ccw(c1368.18,2657.55) 1368.18,2690.43 ; 1368.18,2690.43 ccw(c1368.18,2723.32) 1391.43,2700.07 cw(c1368.18,2723.32) 1368.18,2690.43 ; 1373.34,2823.34 cw(c1340,2856.67) 1340,2809.53 ccw(c1340,2856.67) 1373.34,2823.34 ; 1373.34,2823.34 ccw(c1406.67,2790) 1359.53,2790 cw(c1406.67,2790) 1373.34,2823.34 ; 1795,2395 cw(c1820.68,2369.32) 1823.49,2405.53 ccw(c1820.68,2369.32) 1795,2395 ; 1795,2395 ccw(c1769.32,2420.68) 1805.53,2423.49 cw(c1769.32,2420.68) 1795,2395 ; 1795,2395 ccw(c1770.05,2420.42) 1805.54,2423.38 cw(c1770.05,2420.42) 1795.46,2395.47 ; 1795,2395 cw(c1820.42,2370.05) 1823.38,2405.54 ccw(c1820.42,2370.05) 1795.47,2395.46 ; 1880.43,2488.18 cw(c1913.32,2488.18) 1890.07,2511.43 ccw(c1913.32,2488.18) 1880.43,2488.18 ; 1880.43,2488.18 ccw(c1847.55,2488.18) 1870.8,2511.43 cw(c1847.55,2488.18) 1880.43,2488.18 ; 1283.19,2421.81 cw(c1240.31,2378.94) 1300.95,2378.94 ccw(c1240.31,2378.94) 1283.19,2421.81 ; 1287.1,2665.48 ccw(c1262.15,2690.43) 1297.44,2690.43 cw(c1262.15,2690.43) 1287.1,2665.48 ; C5.1@1289.51,2667.88 cw(c1311.06,2646.33) 1311.06,2676.81 ccw(c1311.06,2646.33) C5.1@1289.51,2667.88 ; R1.2@1304.93,2218.57 ccw(c1281.67,2241.83) 1314.57,2241.83 cw(c1281.67,2241.83) R1.2@1304.93,2218.57 ; C5.1@1309.3,2700.07 ccw(c1235.2,2774.17) 1340,2774.17 cw(c1235.2,2774.17) C5.1@1309.3,2700.07 ; 1314.57,2241.82 ccw(c1347.45,2241.82) 1324.2,2218.57 cw(c1347.45,2241.82) 1314.57,2241.82 ; C5.1@1318.94,2704.06 ccw(c1318.94,2727.44) 1335.47,2710.9 cw(c1318.94,2727.44) C5.1@1318.94,2704.06 ; C5.1@1323.45,2685.92 ccw(c1283.48,2725.89) 1340,2725.89 cw(c1283.48,2725.89) C5.1@1323.45,2685.92 ; 1795,2384.94 ccw(c1846.44,2384.94) 1810.07,2348.57 cw(c1846.44,2384.94) 1795,2384.94 ; P5.3@1825,2444.53 ccw(c1825,2503.74) 1866.87,2461.87 cw(c1825,2503.74) P5.3@1825,2444.53 ; P5.3@1844.53,2425 cw(c1879.6,2425) 1854.8,2449.8 ccw(c1879.6,2425) P5.3@1844.53,2425 ; 1961.22,2702.21 cw(c1894.01,2635) 1989.06,2635 ccw(c1894.01,2635) 1961.22,2702.21 ; 1995.36,2668.07 cw(c1962.29,2635) 2009.06,2635 ccw(c1962.29,2635) 1995.36,2668.07 ; 2010.48,2497.11 cw(c2035.43,2472.15) 2035.43,2507.44 ccw(c2035.43,2472.15) 2010.48,2497.11 ; R11.2@2012.88,2499.51 ccw(c1991.33,2521.06) 2021.81,2521.06 cw(c1991.33,2521.06) R11.2@2012.88,2499.51 ; R11.2@2025.8,2538.57 ccw(c1991.52,2572.85) 2040,2572.85 cw(c1991.52,2572.85) R11.2@2025.8,2538.57 ; S1.1@2027.68,2615.48 cw(c2027.3,2602.79) 2040,2602.79 ccw(c2027.3,2602.79) S1.1@2027.68,2615.48
  Top Layer w25: 1265,2760 1280,2760 1340,2820 1360,2840 ; P3.4@1370,1385 P3.4@1370,1400 ; v1@1509.57,1580 C11.2@1509.57,1625 ; C12.2@1510,1540.43 v1(1510,1580) ; U3.2@1900,1622.4 1962.6,1622.4 1985,1600 ; 1957.5,1492.5 1965,1500 ; v1@1985,1513.69 1985,1520 ; 1998.69,1500 1965,1500 ; C12.2@1501.7,1551.8 ccw(c1482.72,1570.79) v1@1509.57,1570.79 ; C12.2@1501.7,1551.8 ccw(c1482.72,1570.79) v1@1509.57,1570.79 ; C12.2@1501.7,1551.8 ccw(c1481.67,1571.84) 1510,1571.84 cw(c1481.67,1571.84) C12.2@1501.7,1551.8 ; C12.2@1501.7,1551.8 ccw(c1482.72,1570.79) v1@1509.57,1570.79 ; C12.2@1501.7,1551.8 ccw(c1482.72,1570.79) v1@1509.57,1570.79 ; v1@1509.57,1570.79 ccw(c1536.42,1570.79) C12.2@1517.43,1551.8 ; v1@1509.57,1570.79 ccw(c1536.42,1570.79) C12.2@1517.43,1551.8 ; v1@1509.57,1570.79 ccw(c1536.42,1570.79) C12.2@1517.43,1551.8 ; v1@1509.57,1570.79 ccw(c1536.42,1570.79) C12.2@1517.43,1551.8 ; 1509.57,1594.21 cw(c1536.42,1594.21) 1517.43,1613.2 ccw(c1536.42,1594.21) 1509.57,1594.21 ; 1509.57,1594.21 ccw(c1482.72,1594.21) 1501.7,1613.2 cw(c1482.72,1594.21) 1509.57,1594.21 ; C12.2@1517.43,1551.8 cw(c1535.37,1569.74) 1510,1569.74 ccw(c1535.37,1569.74) C12.2@1517.43,1551.8 ; 1965,1500 v1(1975,1510) 1985,1520 ; 1985,1520 v1(1995,1530) 1998.69,1533.69 1998.69,1586.31 ; 1985,1520 1985,1600 ; 1985,1600 1998.69,1586.31 ; 1998.69,1586.31 ccw(c2043.68,1586.31) 2015.79,1551 cw(c2043.68,1586.31) 1998.69,1586.31 ; v1@1998.69,1526.93 cw(c2021.33,1526.93) 2015.34,1548.77 ccw(c2021.33,1526.93) v1@1998.69,1526.93
  Top Layer w30: 1235.43,1960 v1@1345,1960 ; 1263.8,1960 cw(c1263.8,1928.8) v1@1285.86,1950.86 ; 1277.5,1932.5 v1@1295,1950 ; 1280.01,1935.01 ccw(c1265.02,1950) v1@1286.22,1950 ; v1@1282.94,1937.94 cw(c1315,1905.88) v1@1315,1951.22 ; v1@1284.14,1950.86 cw(c1306.2,1928.8) v1@1306.2,1960 ; v1@1293.8,1960 cw(c1293.8,1928.8) v1@1315.86,1950.86 ; v1@1314.14,1950.86 cw(c1336.2,1928.8) v1@1336.2,1960 ; v1@1315.78,1950.94 ccw(c1305.9,1939.1) v1@1295,1950 ; v1@1323.8,1960 cw(c1323.8,1928.8) v1@1345.86,1950.86 ; v1(1345,1950) v1(1315,1950) v1@1295,1950
  Bottom Layer w10: 1682.28,1947.28 1710,1975 v1(1745,1975) v1@1750,1980 ; 1723.8,1975 cw(c1723.8,1953.8) 1738.79,1968.79 ccw(c1723.8,1953.8) 1723.8,1975 ; 1723.8,1975 ccw(c1723.8,1996.2) 1738.79,1981.21 cw(c1723.8,1996.2) 1723.8,1975
  Bottom Layer w25: 1250,1960 1345,1960 1405,2020 1609.56,2020 1682.28,1947.28 1682.28,1901.63 1655,1874.35 1655,1725 v1(1510,1580) 1370,1440 P3.4@1370,1385 1370,1305 1435,1240 1945,1240 1995,1290 v1(1995,1530) v1(2015,1550) 2060,1550 ; 1257.77,1960 cw(c1257.77,1922.77) v1@1284.1,1949.1 ; 1275,2780 1390,2780 ; v1@1285.9,1949.1 cw(c1312.23,1922.77) v1@1312.23,1960 ; v1@1287.77,1960 cw(c1287.77,1922.77) v1@1314.1,1949.1 ; v1@1315.9,1949.1 cw(c1342.23,1922.77) v1@1342.23,1960 ; v1@1317.77,1960 cw(c1317.77,1922.77) v1@1344.1,1949.1 ; v1@1346.28,1950 cw(c1373.51,1950) 1354.26,1969.26 ; 1370,1343.89 cw(c1411.11,1343.89) 1382.04,1372.96 ccw(c1411.11,1343.89) 1370,1343.89 ; 1370,1343.89 ccw(c1328.89,1343.89) 1357.96,1372.96 cw(c1328.89,1343.89) 1370,1343.89 ; 1370,1426.11 cw(c1328.89,1426.11) 1357.96,1397.04 ccw(c1328.89,1426.11) 1370,1426.11 ; 1370,1426.11 ccw(c1411.11,1426.11) 1382.04,1397.04 cw(c1411.11,1426.11) 1370,1426.11
  other v1: 1285,1950
NetC10_2: C10.2 U1.22 | length 1058.1
  Top Layer w10: C10.2@1420.06,1648.65 ccw(c1416.42,1665.78) 1433.33,1661.24 ccw(c1452.38,1656.14) C10.2@1437.75,1642.92 ; C10.2@1423.49,1649.05 ccw(c1423.28,1657.94) v1@1432.18,1657.94 ; C10.2@1430,1640.43 v1(1430,1670) ; 1432.18,1655.5 ccw(c1449,1655.5) C10.2@1437.1,1643.6 ; U1.22@1630.59,1853.15 1660,1882.56 1660,1905 ; v1(1650,1915) 1660,1905 ; 1655.94,1896.16 cw(c1662.59,1902.34) v1@1656.19,1908.77 ; v1@1425.61,1662.4 cw(c1419.1,1651.12) 1431.68,1654.49 ; v1@1425.61,1662.4 cw(c1419.1,1651.12) 1431.68,1654.49 ; v1@1425.61,1662.4 cw(c1419.1,1651.12) 1431.68,1654.49 ; C10.2@1430,1648.8 cw(c1451.2,1648.8) 1436.21,1663.79 ccw(c1451.2,1648.8) C10.2@1430,1648.8 ; C10.2@1430,1648.8 ccw(c1408.8,1648.8) 1423.79,1663.79 cw(c1408.8,1648.8) C10.2@1430,1648.8 ; v1(1430,1670) cw(c1404.57,1670) 1415.75,1647.16 ccw(c1404.57,1670) v1(1430,1670) ; C10.2@1432.18,1652.63 cw(c1442.09,1655.29) v1@1435.57,1663.22 ; C10.2@1432.18,1652.63 cw(c1442.09,1655.29) v1@1435.57,1663.22 ; C10.2@1432.18,1652.63 cw(c1442.09,1655.29) v1@1435.57,1663.22 ; C10.2@1437.1,1643.6 cw(c1454.26,1660.75) 1430,1660.75 ccw(c1454.26,1660.75) C10.2@1437.1,1643.6 ; 1660,1905 cw(c1664.95,1909.95) 1658.32,1912.19 ccw(c1664.95,1909.95) 1660,1905 ; 1660,1905 ccw(c1655.05,1900.05) 1652.81,1906.68 cw(c1655.05,1900.05) 1660,1905 ; C10.2@1420.15,1638.18 ccw(c1412.42,1653.97) 1430,1653.97 cw(c1412.42,1653.97) C10.2@1420.15,1638.18 ; v1@1645.34,1907.56 cw(c1628.72,1881.06) 1660,1881.06 ccw(c1628.72,1881.06) v1@1645.34,1907.56 ; v1@1650.65,1916.03 cw(c1640.05,1899.13) 1660,1899.13 ccw(c1640.05,1899.13) v1@1650.65,1916.03
  Bottom Layer w10: v1(1430,1670) 1430,1695 v1(1650,1915) ; 1430,1691.2 cw(c1408.8,1691.2) 1423.79,1676.21 ccw(c1408.8,1691.2) 1430,1691.2 ; 1430,1691.2 ccw(c1451.2,1691.2) 1436.21,1676.21 cw(c1451.2,1691.2) 1430,1691.2 ; 1635.01,1900.01 cw(c1650,1885.02) 1650,1906.22 ccw(c1650,1885.02) 1635.01,1900.01 ; 1635.01,1900.01 ccw(c1620.02,1915) 1641.22,1915 cw(c1620.02,1915) 1635.01,1900.01
NetJ1_2: J1.2 R7.2 | length 389.1
  Top Layer w10: R7.2@1864.11,1354.31 cw(c1898.01,1344.85) 1888.9,1378.85 ; R7.2@1865.43,1350 1925.84,1410.41 J1.2@2004.13,1410.41 ; R7.2@1865.43,1362.56 ccw(c1865.43,1392.88) 1886.87,1371.44 cw(c1865.43,1392.88) R7.2@1865.43,1362.56 ; R7.2@1865.43,1372.56 ccw(c1865.43,1427.02) 1903.94,1388.51 cw(c1865.43,1427.02) R7.2@1865.43,1372.56 ; R7.2@1884.06,1353.94 cw(c1919.51,1353.94) 1894.44,1379.01 ccw(c1919.51,1353.94) R7.2@1884.06,1353.94
NetJ1_3: J1.3 R5.1 R6.2 | length 921.9
  Top Layer w10: R6.2@1865,1430 R6.2@1870,1435 ; R5.1@1865,1510 1870,1505 R6.2@1870,1435 ; J1.3@2004.13,1436 1871,1436 R6.2@1870,1435 ; R6.2@1878.6,1447.1 ccw(c1905.41,1473.91) 1905.41,1436 cw(c1905.41,1473.91) R6.2@1878.6,1447.1 ; R6.2@1878.6,1447.1 cw(c1899.37,1467.87) 1870,1467.87 ccw(c1899.37,1467.87) R6.2@1878.6,1447.1 ; R6.2@1852.27,1447.1 ccw(c1809.45,1489.92) 1870,1489.92 cw(c1809.45,1489.92) R6.2@1852.27,1447.1 ; R5.1@1852.26,1492.9 cw(c1809.45,1450.08) 1870,1450.08 ccw(c1809.45,1450.08) R5.1@1852.26,1492.9 ; R6.2@1858.39,1451.18 ccw(c1853.66,1462.75) 1865.74,1465.99 cw(c1853.66,1462.75) R6.2@1858.39,1451.18 ; R5.1@1858.39,1488.82 cw(c1853.67,1477.25) 1865.74,1474.02 ccw(c1853.67,1477.25) R5.1@1858.39,1488.82 ; R6.2@1859.34,1440.03 ccw(c1833.6,1465.78) 1870,1465.78 cw(c1833.6,1465.78) R6.2@1859.34,1440.03 ; R5.1@1859.34,1499.97 cw(c1833.59,1474.22) 1870,1474.22 ccw(c1833.59,1474.22) R5.1@1859.34,1499.97 ; 1867.46,1459.56 ccw(c1882.56,1463.61) 1874.74,1450.06 cw(c1882.56,1463.61) 1867.46,1459.56 ; 1867.46,1480.45 cw(c1882.56,1476.4) 1874.74,1489.94 ccw(c1882.56,1476.4) 1867.46,1480.45 ; 1870,1472.13 cw(c1899.36,1472.13) 1878.6,1492.9 ccw(c1899.36,1472.13) 1870,1472.13 ; R6.2@1871.53,1427.84 cw(c1891.23,1408.14) 1891.23,1436 ccw(c1891.23,1408.14) R6.2@1871.53,1427.84 ; R6.2@1878.6,1420.77 cw(c1915.37,1384) 1915.37,1436 ccw(c1915.37,1384) R6.2@1878.6,1420.77
NetLED1_1: LED1.1 R8.2 | length 366.6
  Top Layer w10: R8.2@1725.43,2525 LED1.1@1809.57,2525 ; 1764.61,2525 cw(c1764.61,2480.04) 1796.4,2511.83 ccw(c1764.61,2480.04) 1764.61,2525 ; 1764.61,2525 ccw(c1764.61,2569.96) 1796.4,2538.17 cw(c1764.61,2569.96) 1764.61,2525 ; 1770.39,2525 cw(c1770.39,2569.96) 1738.6,2538.17 ccw(c1770.39,2569.96) 1770.39,2525 ; 1770.39,2525 ccw(c1770.39,2480.04) 1738.6,2511.83 cw(c1770.39,2480.04) 1770.39,2525
OSCI: C4.2 R2.1 U1.5 U2.5 Y2.1 | length 2211.2
  Top Layer w6: U2.5@1563.36,2211.56 1585,2189.92 1585,2136.76 U1.5@1602.75,2119.01 U1.5@1602.75,2121.5
  Top Layer w10: C4.2@1405,2619.57 1405,2610 Y2.1@1515,2500 1456,2441 1456,2319 1460,2315 1460,2314.92 U2.5@1563.36,2211.56 ; C4.2@1407.09,2611.14 cw(c1402.21,2588.92) 1424.19,2594.81 ; C4.2@1409.49,2620.83 cw(c1391.22,2579.07) 1435.25,2590.86 ; C4.2@1423.41,2597.72 cw(c1439.37,2601.99) C4.2@1425.06,2610.25 ; 1483.65,2476.32 cw(c1521.95,2466.06) Y2.1@1514,2504.9 ; 1483.65,2523.68 ccw(c1521.95,2533.94) Y2.1@1514,2495.1 ; 1491.32,2468.65 ccw(c1481.06,2506.95) Y2.1@1519.9,2499 ; 1491.32,2531.35 cw(c1481.06,2493.05) Y2.1@1519.9,2501 ; 1472.32,2457.32 cw(c1515,2414.64) 1515,2475 ccw(c1515,2414.64) 1472.32,2457.32 ; 1472.32,2457.32 ccw(c1429.64,2500) Y2.1@1490,2500 ; 1472.32,2457.32 ccw(c1429.64,2500) Y2.1@1490,2500 ; 1472.32,2542.68 cw(c1429.64,2500) Y2.1@1490,2500 ; 1472.32,2542.68 ccw(c1515,2585.36) 1515,2525 cw(c1515,2585.36) 1472.32,2542.68 ; 1472.32,2542.68 cw(c1429.64,2500) Y2.1@1490,2500 ; 1489.39,2474.39 cw(c1515,2448.79) 1515,2485 ccw(c1515,2448.79) 1489.39,2474.39 ; 1489.39,2474.39 ccw(c1463.79,2500) Y2.1@1500,2500 ; 1489.39,2474.39 ccw(c1463.79,2500) Y2.1@1500,2500 ; 1489.39,2525.61 cw(c1463.79,2500) Y2.1@1500,2500 ; 1489.39,2525.61 ccw(c1515,2551.21) 1515,2515 cw(c1515,2551.21) 1489.39,2525.61 ; 1489.39,2525.61 cw(c1463.79,2500) Y2.1@1500,2500 ; C4.2@1408.94,2600.94 cw(c1408.94,2588.59) 1417.68,2597.32 ccw(c1408.94,2588.59) C4.2@1408.94,2600.94 ; C4.2@1417.56,2619.57 ccw(c1470.97,2619.57) 1433.2,2581.8 cw(c1470.97,2619.57) C4.2@1417.56,2619.57 ; C4.2@1427.56,2619.57 ccw(c1505.12,2619.57) 1450.27,2564.73 cw(c1505.12,2619.57) C4.2@1427.56,2619.57
  Bottom Layer w10: R2.1@1424.17,2610.5 ccw(c1466.3,2629.21) 1454.37,2584.69 ; R2.1@1433.83,2613 ccw(c1456.56,2618.24) 1450.52,2595.72 ; R2.1@1434.74,2594.94 cw(c1443.01,2580.63) R2.1@1447.28,2596.59 ; R2.1@1440.43,2610 1515,2535.43 ; Y2.1@1515,2500 1515,2535.43 ; 1515,2535.43 cw(c1502.39,2535.43) 1506.62,2523.55 ccw(c1502.39,2535.43) 1515,2535.43 ; 1515,2535.43 ccw(c1527.61,2535.43) 1523.38,2523.55 cw(c1527.61,2535.43) 1515,2535.43 ; R2.1@1425.43,2592.44 cw(c1425.43,2513.84) 1481.01,2569.42 ccw(c1425.43,2513.84) R2.1@1425.43,2592.44 ; R2.1@1425.43,2602.44 cw(c1425.43,2547.98) 1463.94,2586.49 ccw(c1425.43,2547.98) R2.1@1425.43,2602.44
OSCO: C5.2 R2.2 U1.6 U2.6 Y2.2 | length 2220.7
  Top Layer w6: U2.6@1549.44,2197.64 1549.44,2195.26 1571.81,2172.88 1571.81,2122.11 U1.6@1588.83,2105.09 ; U2.6@1565.58,2183.5 ccw(c1576.17,2183.5) 1568.68,2176.01 cw(c1576.17,2183.5) U2.6@1565.58,2183.5
  Top Layer w10: C5.2@1315,2619.57 Y2.2@1315,2500 1375,2500 ; U2.6@1549.44,2197.64 1528.65,2218.43 1528.65,2223.65 ; 1315,2536.21 cw(c1278.79,2536.21) 1304.39,2510.61 ccw(c1278.79,2536.21) 1315,2536.21 ; 1315,2536.21 ccw(c1351.21,2536.21) 1325.61,2510.61 cw(c1351.21,2536.21) 1315,2536.21 ; 1315,2560.36 cw(c1254.64,2560.36) 1297.32,2517.68 ccw(c1254.64,2560.36) 1315,2560.36 ; 1315,2560.36 ccw(c1375.36,2560.36) 1332.68,2517.68 cw(c1375.36,2560.36) 1315,2560.36 ; 1315,2574.61 cw(c1359.96,2574.61) 1328.17,2606.4 ccw(c1359.96,2574.61) 1315,2574.61 ; 1315,2574.61 ccw(c1270.04,2574.61) 1301.83,2606.4 cw(c1270.04,2574.61) 1315,2574.61 ; 1351,2500 cw(c1351,2535.7) 1325.65,2510.56 ccw(c1351,2535.7) 1351,2500 ; 1351,2500 ccw(c1351,2464.3) 1325.65,2489.44 cw(c1351,2464.3) 1351,2500 ; 1375,2500 cw(c1375,2559.49) 1332.75,2517.6 ccw(c1375,2559.49) 1375,2500 ; 1375,2500 ccw(c1375,2440.51) 1332.75,2482.4 cw(c1375,2440.51) 1375,2500 ; 1375,2500 1440,2435 1440,2312.29 1528.65,2223.65 ; 1528.65,2223.64 ccw(c1542.55,2223.64) 1535.3,2211.78 cw(c1542.55,2223.64) 1528.65,2223.64
  Bottom Layer w10: Y2.2@1310.1,2501 cw(c1348.94,2493.05) 1338.68,2531.35 ; Y2.2@1315,2500 1369.57,2554.57 R2.2@1369.57,2610 ; Y2.2@1316,2495.1 ccw(c1308.05,2533.94) 1346.35,2523.68 ; 1340.61,2525.61 cw(c1315,2551.21) 1315,2515 ccw(c1315,2551.21) 1340.61,2525.61 ; 1340.61,2525.61 ccw(c1366.21,2500) 1330,2500 cw(c1366.21,2500) 1340.61,2525.61 ; 1357.68,2542.68 cw(c1315,2585.36) 1315,2525 ccw(c1315,2585.36) 1357.68,2542.68 ; 1357.68,2542.68 ccw(c1400.36,2500) 1340,2500 cw(c1400.36,2500) 1357.68,2542.68 ; R2.2@1345.2,2594.97 cw(c1320.57,2552.61) 1369.57,2552.61 ccw(c1320.57,2552.61) R2.2@1345.2,2594.97 ; R2.2@1350.23,2603.61 cw(c1330.68,2570) 1369.57,2570 ccw(c1330.68,2570) R2.2@1350.23,2603.61 ; R2.2@1355.26,2612.25 cw(c1340.79,2587.38) 1369.57,2587.38 ccw(c1340.79,2587.38) R2.2@1355.26,2612.25
PA0: P2.7 pad.1@1055,2290 U1.10 U2.14 | length 1775.8
  Top Layer w6: U2.14@1438.08,2086.28 1464.37,2060 1522.56,2060 U1.10@1533.15,2049.41 ; 1518.76,2057.93 ccw(c1524.24,2067.44) U1.10@1527.08,2056.84 ; 1510.83,2060 cw(c1510.83,2038.23) 1526.22,2053.62 ccw(c1510.83,2038.23) 1510.83,2060 ; 1525.31,2060 cw(c1525.31,2052.71) 1530.47,2057.87 ccw(c1525.31,2052.71) 1525.31,2060
  Top Layer w10: v1@1358.8,2129.76 ccw(c1372.87,2132.64) 1369.15,2118.77 ; v1(1360,2130) 1383.34,2106.66 1417.71,2106.66 U2.14@1438.08,2086.28 ; v1@1360.24,2131.2 cw(c1357.36,2117.13) 1371.23,2120.85 ; 1374.99,2115.01 cw(c1389.98,2130) 1368.78,2130 ccw(c1389.98,2130) 1374.99,2115.01 ; 1374.99,2115.01 ccw(c1360,2100.02) 1360,2121.22 cw(c1360,2100.02) 1374.99,2115.01 ; 1408.89,2106.66 cw(c1408.89,2085.38) 1423.94,2100.43 ccw(c1408.89,2085.38) 1408.89,2106.66
  Bottom Layer w10: pad.1@1055,2290 P2.7@1140,2290 1140,2265 1274,2131 1359,2131 v1(1360,2130) ; P2.7@1116.78,2282.1 ccw(c1095.78,2274.96) 1101.52,2296.39 ccw(c1105.72,2312.07) P2.7@1119.38,2303.28 ; P2.7@1116.78,2297.9 cw(c1095.78,2305.04) 1101.52,2283.61 cw(c1105.72,2267.93) P2.7@1119.38,2276.72 ; pad.1@1080.79,2290 cw(c1080.79,2230.79) 1122.66,2272.66 ccw(c1080.79,2230.79) pad.1@1080.79,2290 ; pad.1@1080.79,2290 ccw(c1080.79,2349.21) 1122.66,2307.34 cw(c1080.79,2349.21) pad.1@1080.79,2290 ; pad.1@1086.36,2277.01 cw(c1099.56,2268.97) 1103.56,2283.9 ; pad.1@1086.36,2277.01 cw(c1099.56,2268.97) 1103.56,2283.9 ; pad.1@1086.36,2277.01 cw(c1099.56,2268.97) 1103.56,2283.9 ; pad.1@1086.36,2302.99 ccw(c1099.56,2311.03) 1103.56,2296.1 ; pad.1@1086.36,2302.99 ccw(c1099.56,2311.03) 1103.56,2296.1 ; pad.1@1086.36,2302.99 ccw(c1099.56,2311.03) 1103.56,2296.1 ; pad.1@1088.73,2282.12 cw(c1109.12,2275.35) 1103.56,2296.1 ; pad.1@1088.73,2282.12 cw(c1109.12,2275.35) 1103.56,2296.1 ; pad.1@1088.73,2282.12 cw(c1109.12,2275.35) 1103.56,2296.1 ; pad.1@1088.73,2297.88 ccw(c1109.12,2304.65) 1103.56,2283.9 ; pad.1@1088.73,2297.88 ccw(c1109.12,2304.65) 1103.56,2283.9 ; pad.1@1088.73,2297.88 ccw(c1109.12,2304.65) 1103.56,2283.9 ; 1101.21,2290 cw(c1101.21,2326.21) 1075.61,2300.61 ccw(c1101.21,2326.21) 1101.21,2290 ; 1101.21,2290 ccw(c1101.21,2253.79) 1075.61,2279.39 cw(c1101.21,2253.79) 1101.21,2290 ; 1104.93,2290 cw(c1104.93,2254.93) 1129.73,2279.73 ccw(c1104.93,2254.93) 1104.93,2290 ; 1104.93,2290 ccw(c1104.93,2325.07) 1129.73,2300.27 cw(c1104.93,2325.07) 1104.93,2290 ; P2.7@1125.36,2290 cw(c1125.36,2350.36) 1082.68,2307.68 ccw(c1125.36,2350.36) P2.7@1125.36,2290 ; P2.7@1125.36,2290 ccw(c1125.36,2229.64) 1082.68,2272.32 cw(c1125.36,2229.64) P2.7@1125.36,2290 ; 1336.39,2131 cw(c1336.39,2106.39) 1353.79,2123.79 ccw(c1336.39,2106.39) 1336.39,2131 ; 1341.22,2131 ccw(c1341.22,2148.78) 1353.79,2136.21 cw(c1341.22,2148.78) 1341.22,2131
PA1: P2.8 pad.1@1055,2190 U1.11 U2.15 | length 2194.5
  Top Layer w6: U2.15@1424.17,2072.36 1451.53,2045 1509.72,2045 U1.11@1519.23,2035.49 ; 1505.13,2043.85 ccw(c1510.22,2052.67) U1.11@1513.12,2042.9 ; 1499.52,2045 cw(c1499.52,2026.92) 1512.3,2039.7 ccw(c1499.52,2026.92) 1499.52,2045
  Top Layer w10: v1(1335,2090) 1335.66,2090.66 1405.87,2090.66 U2.15@1424.17,2072.36 ; v1@1341.21,2083.79 cw(c1357.79,2067.21) 1357.79,2090.66 ccw(c1357.79,2067.21) v1@1341.21,2083.79 ; v1@1341.21,2096.21 ccw(c1354.6,2109.6) 1354.6,2090.66 cw(c1354.6,2109.6) v1@1341.21,2096.21 ; 1400,2090.66 cw(c1400,2076.48) 1410.02,2086.51 ccw(c1400,2076.48) 1400,2090.66
  Bottom Layer w10: pad.1@1055,2190 P2.8@1140,2190 1160,2190 1235,2115 1310,2115 v1(1335,2090) ; P2.8@1116.78,2182.1 ccw(c1095.78,2174.96) 1101.52,2196.39 ccw(c1105.72,2212.07) P2.8@1119.38,2203.28 ; P2.8@1116.78,2197.9 cw(c1095.78,2205.04) 1101.52,2183.61 cw(c1105.72,2167.93) P2.8@1119.38,2176.72 ; P2.8@1135.03,2187.7 ccw(c1186.01,2211.29) 1171.47,2157.04 ; P2.8@1144.11,2191.9 ccw(c1211.26,2222.98) 1192.11,2151.51 ; P2.8@1144.3,2191.41 ccw(c1178.9,2202.74) 1169.48,2167.57 ; pad.1@1080.79,2190 cw(c1080.79,2130.79) 1122.66,2172.66 ccw(c1080.79,2130.79) pad.1@1080.79,2190 ; pad.1@1080.79,2190 ccw(c1080.79,2249.21) 1122.66,2207.34 cw(c1080.79,2249.21) pad.1@1080.79,2190 ; pad.1@1086.36,2177.01 cw(c1099.56,2168.97) 1103.56,2183.9 ; pad.1@1086.36,2177.01 cw(c1099.56,2168.97) 1103.56,2183.9 ; pad.1@1086.36,2177.01 cw(c1099.56,2168.97) 1103.56,2183.9 ; pad.1@1086.36,2202.99 ccw(c1099.56,2211.03) 1103.56,2196.1 ; pad.1@1086.36,2202.99 ccw(c1099.56,2211.03) 1103.56,2196.1 ; pad.1@1086.36,2202.99 ccw(c1099.56,2211.03) 1103.56,2196.1 ; pad.1@1088.73,2182.12 cw(c1109.12,2175.35) 1103.56,2196.1 ; pad.1@1088.73,2182.12 cw(c1109.12,2175.35) 1103.56,2196.1 ; pad.1@1088.73,2182.12 cw(c1109.12,2175.35) 1103.56,2196.1 ; pad.1@1088.73,2197.88 ccw(c1109.12,2204.65) 1103.56,2183.9 ; pad.1@1088.73,2197.88 ccw(c1109.12,2204.65) 1103.56,2183.9 ; pad.1@1088.73,2197.88 ccw(c1109.12,2204.65) 1103.56,2183.9 ; 1101.21,2190 cw(c1101.21,2226.21) 1075.61,2200.61 ccw(c1101.21,2226.21) 1101.21,2190 ; 1101.21,2190 ccw(c1101.21,2153.79) 1075.61,2179.39 cw(c1101.21,2153.79) 1101.21,2190 ; 1104.93,2190 cw(c1104.93,2154.93) 1129.73,2179.73 ccw(c1104.93,2154.93) 1104.93,2190 ; 1104.93,2190 ccw(c1104.93,2225.07) 1129.73,2200.27 cw(c1104.93,2225.07) 1104.93,2190 ; P2.8@1125.36,2190 cw(c1125.36,2250.36) 1082.68,2207.68 ccw(c1125.36,2250.36) P2.8@1125.36,2190 ; P2.8@1125.36,2190 ccw(c1125.36,2129.64) 1082.68,2172.32 cw(c1125.36,2129.64) P2.8@1125.36,2190 ; 1320.01,2104.99 cw(c1305.02,2090) 1326.22,2090 ccw(c1305.02,2090) 1320.01,2104.99 ; 1320.01,2104.99 ccw(c1335,2119.98) 1335,2098.78 cw(c1335,2119.98) 1320.01,2104.99 ; P2.8@1140,2165.47 cw(c1140,2057.97) 1216.01,2133.99 ccw(c1140,2057.97) P2.8@1140,2165.47 ; P2.8@1140,2175.47 cw(c1140,2092.12) 1198.94,2151.06 ccw(c1140,2092.12) P2.8@1140,2175.47 ; P2.8@1140,2185.47 cw(c1140,2126.26) 1181.87,2168.13 ccw(c1140,2126.26) P2.8@1140,2185.47